# Altium PCB PCB_NUMPAD_AV-RK MK II_2023-07-25.pcbdoc
Units mil, origin at the board's own origin, x right, y up, seen from the top; angles counter-clockwise.
Board outline 8288.68 x 6421.25 mil, 2 copper layers (Top Layer, Bottom Layer); 72 components, 67 nets, 315 pads, 109 vias.
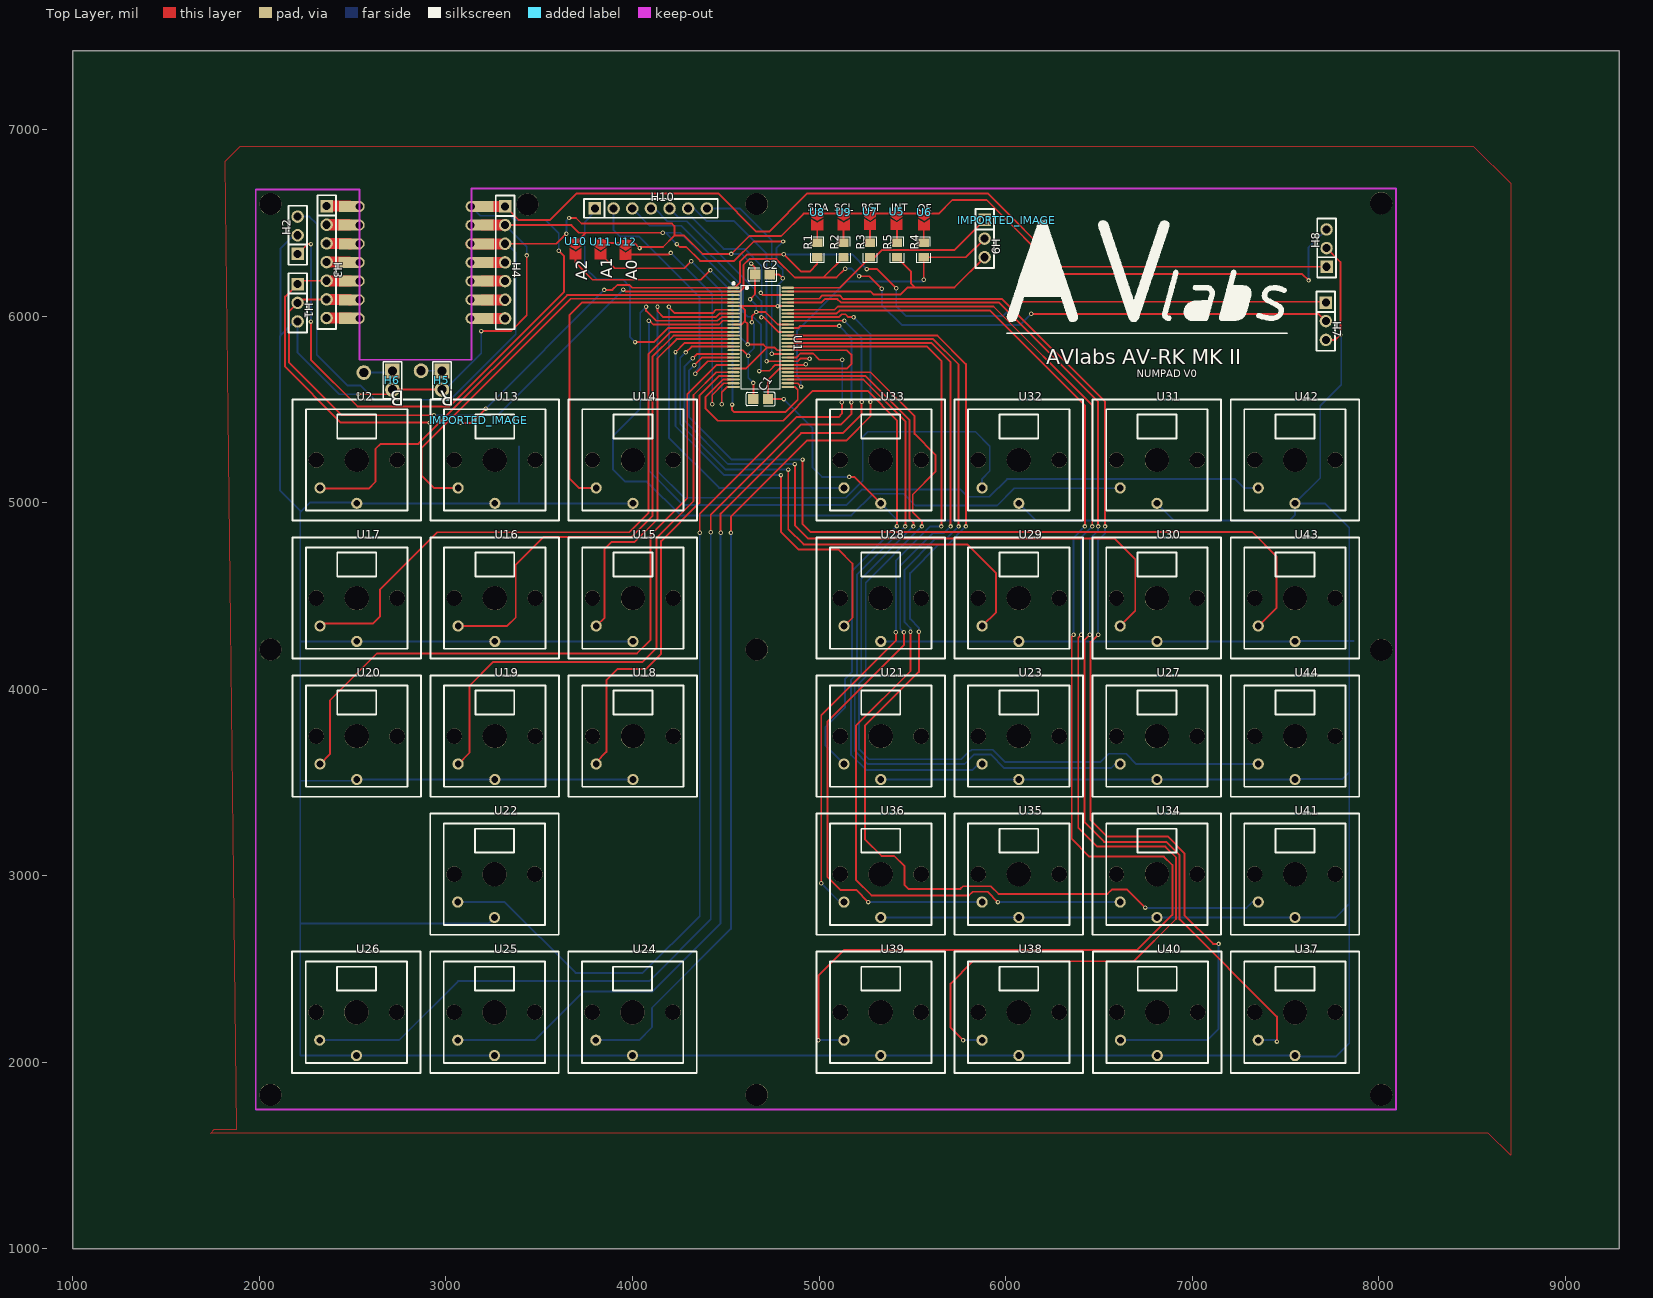
[diagram p0: Top Layer view]
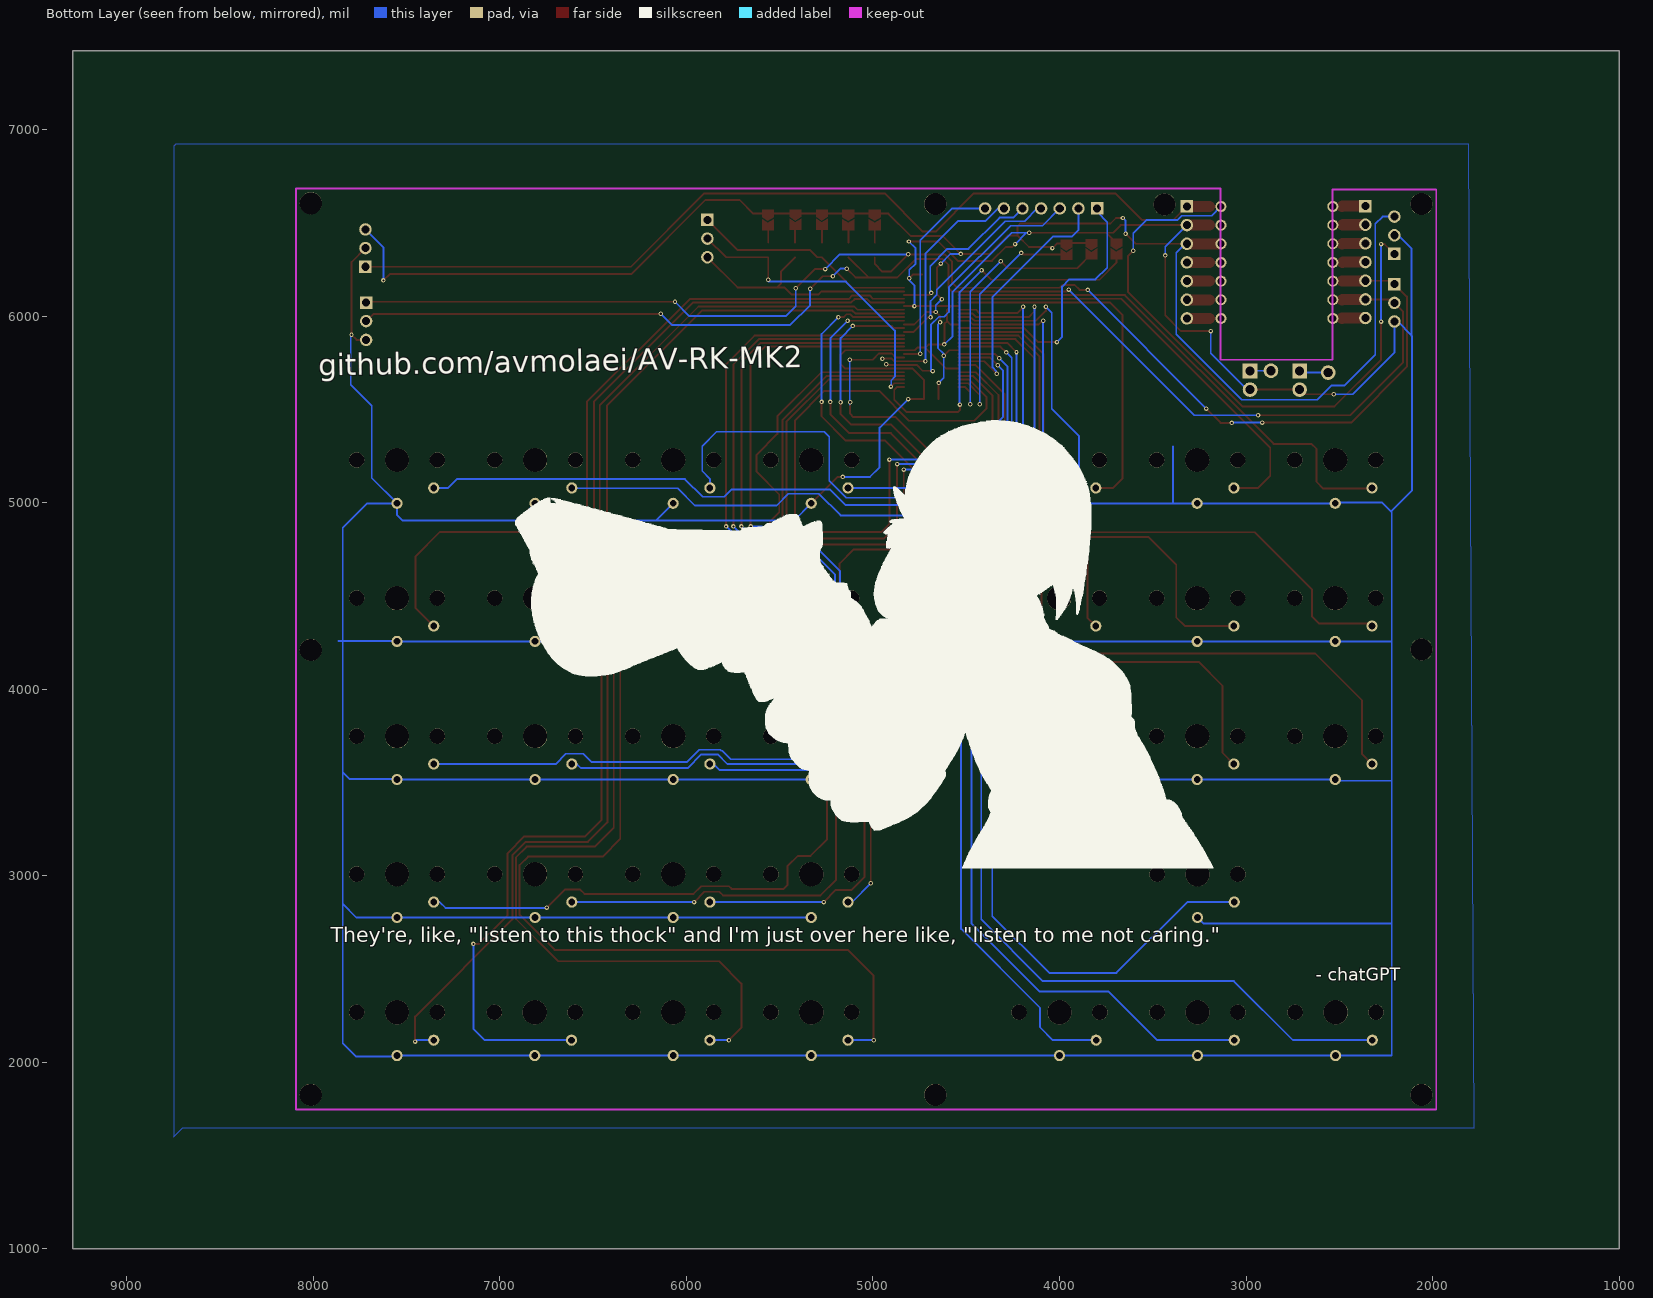
[diagram p1: Bottom Layer view, seen from below]

## Layer stack, top to bottom
Top Layer: signal copper (thickness not stored)
Dielectric: dielectric 12.6, FR-4, Dk 4.8
Bottom Layer: signal copper (thickness not stored)

## Board outline
9288.68,1000 1000,1000 1000,7421.25 9288.68,7421.25

## Components (designator, comment, footprint, x,y, rotation, side; value= is the part's Value field where it differs from the comment)
C1 "100nF" C0805 4687,5555.11 r0 top
C2 "100nF" C0805 4696.85,6222.43 r0 top
H1 "I2C_POGO_L" HDR-TH_3P-P2.54-V-M 2204.73,6070.86 r270 top
H2 "PWR_POGO_L" HDR-TH_3P-P2.54-V-M 2204.73,6433.06 r90 top
H3 "X6511WV-07H-C30D60" HDR-TH_7P-P2.54-V-M 2360.24,6289.36 r270 top
H4 "X6511WV-07H-C30D60" HDR-TH_7P-P2.54-V-M 3316.93,6287.39 r270 top
H5 "RST_MCU" HDR-TH_2P-P2.54-V-M 2978.35,5655.5 r270 top
H6 "BATT_MCU" HDR-TH_2P-P2.54-V-M 2712.6,5655.5 r270 top
H7 "I2C_POGO_R" HDR-TH_3P-P2.54-V-M 7716.53,5972.43 r270 top
H8 "PWR_POGO_R" HDR-TH_3P-P2.54-V-M 7720.46,6364.16 r90 top
H9 "PCA_PINS" HDR-TH_3P-P2.54-V-M 5887.79,6415.34 r270 top
H10 "X6511WV-07H-C30D60" HDR-TH_7P-P2.54-V-M 4098.42,6576.76 r0 top
IMPORTED_IMAGE "IMPORTED_IMAGE" IMPORTED_IMAGE 3174.53,5440.91 r0 top
IMPORTED_IMAGE "IMPORTED_IMAGE" IMPORTED_IMAGE 6007.15,6512.49 r0 top
R1 "4.7kΩ" R0805 4990.15,6354.32 r90 top
R2 "4.7kΩ" R0805 5131.89,6354.32 r90 top
R3 "1.1kΩ" R0805 5273.62,6354.32 r90 top
R4 "1.1kΩ" R0805 5561.02,6354.32 r90 top
R5 "2kΩ" R0805 5417.32,6354.32 r90 top
U1 "PCA9505DGG,118" TSSOP-56_L14.0-W6.1-P0.50-LS8.1-BL 4687,5885.82 r270 top
U2 "TECLA KAILH CHOC BAJO PERFIL 1350 RGB COPY" "TECLA  KAILH CHOC BAJO PERFIL 1350 RGB" 2521.65,5228.34 r0 top
U5 "beautiful-solderbridge" BEAUTIFUL-SOLDER-BRIDGE 5415.35,6559.05 r90 top
U6 "beautiful-solderbridge" BEAUTIFUL-SOLDER-BRIDGE 5562.99,6557.08 r90 top
U7 "beautiful-solderbridge" BEAUTIFUL-SOLDER-BRIDGE 5273.62,6559.05 r90 top
U8 "beautiful-solderbridge" BEAUTIFUL-SOLDER-BRIDGE 4990.15,6557.08 r90 top
U9 "beautiful-solderbridge" BEAUTIFUL-SOLDER-BRIDGE 5131.89,6557.08 r90 top
U10 "beautiful-solderbridge" BEAUTIFUL-SOLDER-BRIDGE 3694.88,6401.56 r90 top
U11 "beautiful-solderbridge" BEAUTIFUL-SOLDER-BRIDGE 3828.74,6399.6 r90 top
U12 "beautiful-solderbridge" BEAUTIFUL-SOLDER-BRIDGE 3962.6,6397.63 r90 top
U13 "TECLA KAILH CHOC BAJO PERFIL 1350 RGB COPY" "TECLA  KAILH CHOC BAJO PERFIL 1350 RGB" 3261.81,5228.34 r0 top
U14 "TECLA KAILH CHOC BAJO PERFIL 1350 RGB COPY" "TECLA  KAILH CHOC BAJO PERFIL 1350 RGB" 4001.97,5228.34 r0 top
U15 "TECLA KAILH CHOC BAJO PERFIL 1350 RGB COPY" "TECLA  KAILH CHOC BAJO PERFIL 1350 RGB" 4001.97,4488.18 r0 top
U16 "TECLA KAILH CHOC BAJO PERFIL 1350 RGB COPY" "TECLA  KAILH CHOC BAJO PERFIL 1350 RGB" 3261.81,4488.18 r0 top
U17 "TECLA KAILH CHOC BAJO PERFIL 1350 RGB COPY" "TECLA  KAILH CHOC BAJO PERFIL 1350 RGB" 2521.65,4488.18 r0 top
U18 "TECLA KAILH CHOC BAJO PERFIL 1350 RGB COPY" "TECLA  KAILH CHOC BAJO PERFIL 1350 RGB" 4001.97,3748.03 r0 top
U19 "TECLA KAILH CHOC BAJO PERFIL 1350 RGB COPY" "TECLA  KAILH CHOC BAJO PERFIL 1350 RGB" 3261.81,3748.03 r0 top
U20 "TECLA KAILH CHOC BAJO PERFIL 1350 RGB COPY" "TECLA  KAILH CHOC BAJO PERFIL 1350 RGB" 2521.65,3748.03 r0 top
U21 "TECLA KAILH CHOC BAJO PERFIL 1350 RGB COPY" "TECLA  KAILH CHOC BAJO PERFIL 1350 RGB" 5330.7,3748.03 r0 top
U22 "TECLA KAILH CHOC BAJO PERFIL 1350 RGB COPY" "TECLA  KAILH CHOC BAJO PERFIL 1350 RGB" 3259.84,3007.87 r0 top
U23 "TECLA KAILH CHOC BAJO PERFIL 1350 RGB COPY" "TECLA  KAILH CHOC BAJO PERFIL 1350 RGB" 6070.86,3748.03 r0 top
U24 "TECLA KAILH CHOC BAJO PERFIL 1350 RGB COPY" "TECLA  KAILH CHOC BAJO PERFIL 1350 RGB" 4000,2267.72 r0 top
U25 "TECLA KAILH CHOC BAJO PERFIL 1350 RGB COPY" "TECLA  KAILH CHOC BAJO PERFIL 1350 RGB" 3259.84,2267.72 r0 top
U26 "TECLA KAILH CHOC BAJO PERFIL 1350 RGB COPY" "TECLA  KAILH CHOC BAJO PERFIL 1350 RGB" 2519.69,2267.72 r0 top
U27 "TECLA KAILH CHOC BAJO PERFIL 1350 RGB COPY" "TECLA  KAILH CHOC BAJO PERFIL 1350 RGB" 6811.02,3748.03 r0 top
U28 "TECLA KAILH CHOC BAJO PERFIL 1350 RGB COPY" "TECLA  KAILH CHOC BAJO PERFIL 1350 RGB" 5330.7,4488.18 r0 top
U29 "TECLA KAILH CHOC BAJO PERFIL 1350 RGB COPY" "TECLA  KAILH CHOC BAJO PERFIL 1350 RGB" 6070.86,4488.18 r0 top
U30 "TECLA KAILH CHOC BAJO PERFIL 1350 RGB COPY" "TECLA  KAILH CHOC BAJO PERFIL 1350 RGB" 6811.02,4488.18 r0 top
U31 "TECLA KAILH CHOC BAJO PERFIL 1350 RGB COPY" "TECLA  KAILH CHOC BAJO PERFIL 1350 RGB" 6811.02,5228.34 r0 top
U32 "TECLA KAILH CHOC BAJO PERFIL 1350 RGB COPY" "TECLA  KAILH CHOC BAJO PERFIL 1350 RGB" 6070.86,5228.34 r0 top
U33 "TECLA KAILH CHOC BAJO PERFIL 1350 RGB COPY" "TECLA  KAILH CHOC BAJO PERFIL 1350 RGB" 5330.7,5228.34 r0 top
U34 "TECLA KAILH CHOC BAJO PERFIL 1350 RGB COPY" "TECLA  KAILH CHOC BAJO PERFIL 1350 RGB" 6811.02,3007.87 r0 top
U35 "TECLA KAILH CHOC BAJO PERFIL 1350 RGB COPY" "TECLA  KAILH CHOC BAJO PERFIL 1350 RGB" 6070.86,3007.87 r0 top
U36 "TECLA KAILH CHOC BAJO PERFIL 1350 RGB COPY" "TECLA  KAILH CHOC BAJO PERFIL 1350 RGB" 5330.7,3007.87 r0 top
U37 "TECLA KAILH CHOC BAJO PERFIL 1350 RGB COPY" "TECLA  KAILH CHOC BAJO PERFIL 1350 RGB" 7551.17,2267.72 r0 top
U38 "TECLA KAILH CHOC BAJO PERFIL 1350 RGB COPY" "TECLA  KAILH CHOC BAJO PERFIL 1350 RGB" 6070.86,2267.72 r0 top
U39 "TECLA KAILH CHOC BAJO PERFIL 1350 RGB COPY" "TECLA  KAILH CHOC BAJO PERFIL 1350 RGB" 5330.7,2267.72 r0 top
U40 "TECLA KAILH CHOC BAJO PERFIL 1350 RGB COPY" "TECLA  KAILH CHOC BAJO PERFIL 1350 RGB" 6812.98,2267.72 r0 top
U41 "TECLA KAILH CHOC BAJO PERFIL 1350 RGB COPY" "TECLA  KAILH CHOC BAJO PERFIL 1350 RGB" 7551.17,3007.87 r0 top
U42 "TECLA KAILH CHOC BAJO PERFIL 1350 RGB COPY" "TECLA  KAILH CHOC BAJO PERFIL 1350 RGB" 7551.17,5228.34 r0 top
U43 "TECLA KAILH CHOC BAJO PERFIL 1350 RGB COPY" "TECLA  KAILH CHOC BAJO PERFIL 1350 RGB" 7551.17,4488.18 r0 top
U44 "TECLA KAILH CHOC BAJO PERFIL 1350 RGB COPY" "TECLA  KAILH CHOC BAJO PERFIL 1350 RGB" 7551.17,3748.03 r0 top
? "" ? 3631.91,5678.24 r0 top
? "" ? 2078.09,4858.27 r0 top
? "" ? 3631.91,4839.06 r0 top
? "" ? 4391.46,4858.27 r0 top
? "" ? 4463.06,4118.1 r0 top
? "" ? 4403.09,4118.13 r0 top
? "" ? 2894.07,3377.95 r0 top
? "" ? 2889.76,2676.35 r0 top
? "" ? 6440.91,5576.04 r0 top
? "" ? 5037.4,6684.42 r0 top
? "" ? 8432.71,4220.47 r0 top

## Footprints (in the part's own frame and the unit in brackets; to place one, negate y for a bottom-side part, rotate by r counter-clockwise, add the part's x,y. Pads: shape width x height; smd on the part's side, far side on the other; paste and mask are expansions set on the pad)
BEAUTIFUL-SOLDER-BRIDGE [mil]
  Top Layer region: -96.46,31.5 -37.4,31.5 -57.09,0 -37.4,-31.5 -96.46,-31.5
  Top Layer region: -47.24,0 -27.56,31.5 11.81,31.5 11.81,-31.5 -27.56,-31.5
C0805 [mm]
  rect 1.41x1.35 smd paste-100 mask+0.051: 1(-1,0) 2(1,0)
  silkscreen extent -1.96,-0.9 1.96,0.9
HDR-TH_2P-P2.54-V-M [mm]
  rect 2x2 hole 1.2 paste+0 mask+0.051: 1(-1.27,0)
  round 2 hole 1.2 paste+0 mask+0.051: 2(1.27,0)
  silkscreen extent -2.54,-1.27 2.54,1.27
HDR-TH_3P-P2.54-V-M [mm]
  rect 1.7x1.7 hole 1.1 paste+0 mask+0.051: 1(-2.54,0)
  round 1.7 hole 1.1 paste+0 mask+0.051: 2(0,0) 3(2.54,0)
  silkscreen extent -4.02,-1.27 4.02,1.27
HDR-TH_7P-P2.54-V-M [mm]
  rect 1.7x1.7 hole 1.1 paste+0 mask+0.051: 1(-7.62,0)
  round 1.7 hole 1.1 paste+0 mask+0.051: 2(-5.08,0) 3(-2.54,0) 4(0,0) 5(2.54,0) 6(5.08,0) 7(7.62,0)
  silkscreen extent -9.1,-1.27 9.1,1.27
IMPORTED_IMAGE [mil]
R0805 [mil]
  rect 44.59x54.21 smd paste-3937.01 mask+2: 1(-39.37,0) 2(39.37,0)
  silkscreen extent -69,-36 69,36
"TECLA  KAILH CHOC BAJO PERFIL 1350 RGB" [mil]
  round 60 hole 36 paste+0 mask+2: 1(-196.85,-149.65) 2(0,-232.32)
  round 82.68 hole 82.68 unplated paste+0: ""(-216.53,-0.04) ""(216.54,-0.04)
  round 129.92 hole 129.92 unplated paste+0: ""(0,0)
  silkscreen extent -344,-325 344,325
TSSOP-56_L14.0-W6.1-P0.50-LS8.1-BL [mm]
  oval 0.28x1.7 smd paste+0 mask+0.051: 1(-6.75,-3.7) 2(-6.25,-3.7) 3(-5.75,-3.7) 4(-5.25,-3.7) 5(-4.75,-3.7) 6(-4.25,-3.7) 7(-3.75,-3.7) 8(-3.25,-3.7) 9(-2.75,-3.7) 10(-2.25,-3.7) 11(-1.75,-3.7) 12(-1.25,-3.7) 13(-0.75,-3.7) 14(-0.25,-3.7) 15(0.25,-3.7) 16(0.75,-3.7) 17(1.25,-3.7) 18(1.75,-3.7) 19(2.25,-3.7) 20(2.75,-3.7) 21(3.25,-3.7) 22(3.75,-3.7) 23(4.25,-3.7) 24(4.75,-3.7) 25(5.25,-3.7) 26(5.75,-3.7) 27(6.25,-3.7) 28(6.75,-3.7) 29(6.75,3.7) 30(6.25,3.7) 31(5.75,3.7) 32(5.25,3.7) 33(4.75,3.7) 34(4.25,3.7) 35(3.75,3.7) 36(3.25,3.7) 37(2.75,3.7) 38(2.25,3.7) 39(1.75,3.7) 40(1.25,3.7) 41(0.75,3.7) 42(0.25,3.7) 43(-0.25,3.7) 44(-0.75,3.7) 45(-1.25,3.7) 46(-1.75,3.7) 47(-2.25,3.7) 48(-2.75,3.7) 49(-3.25,3.7) 50(-3.75,3.7) 51(-4.25,3.7) 52(-4.75,3.7) 53(-5.25,3.7) 54(-5.75,3.7) 55(-6.25,3.7) 56(-6.75,3.7)
  silkscreen extent -7.49,-3.85 7.08,2.62
? [mil]

## Free pads (board coordinates)
  rect 118.11x59.05 smd paste+0 mask+2.01: 1(2484.41,6587.15) 2(2482.4,6487.82) 3(2484.41,6387.15) 4(2482.4,6287.82) 5(2484.41,6187.15) 6(2484.41,6087.15) 7(2484.37,5988.14) 8(3194.41,5987.15) 9(3194.41,6087.15) 10(3194.41,6187.15) 11(3194.41,6287.15) 14(3194.41,6587.15) 14(3194.85,6488.2) 14(3198.12,6387.3)
  round 59.05 hole 39.37 paste+0 mask+2.01: 1(2534.65,6587.39) 2(2534.65,6487.39) 3(2534.65,6387.39) 4(2534.65,6287.39) 5(2534.65,6187.39) 6(2534.41,6087.15) 7(2534.41,5987.15) 8(3134.41,5987.15) 9(3134.41,6087.15) 10(3134.41,6187.15) 11(3134.41,6287.15) 12(3134.41,6387.15) 13(3134.41,6487.15) 14(3134.65,6587.39)
  round 78.74 hole 47.24 slot 47.44 at 0 deg paste+0 mask+2: 3(2559.6,5696.84) 4(2866.27,5706.68)
  round 118.11 hole 118.11 unplated paste+0: ""(2059.06,1824.8) ""(2059.06,4212.59) ""(2059.06,6600.38) ""(3437.01,6598.41) ""(4665.35,1824.8) ""(4665.35,4212.59) ""(4665.35,6600.38) ""(8013.77,1824.8) ""(8013.77,4210.62) ""(8013.77,6604.32)

## Via types
v1: diameter 24.02, hole 12.01, Top Layer to Bottom Layer, tented both sides, 109 vias

## Nets (pads, with @x,y where several pads share a name; then routed paths per layer and width w, separated by ;. In a path a pad name is that pad's centre, name@x,y a point inside that pad or via, vN(x,y) a via of type N, cw(c..) or ccw(c..) an arc to the next point about the centre after c; other vN are vias at no path point)
5V_MCU: H2.1 H4.1 H8.1 pad.14@3134.65,6587.39 pad.14@3194.41,6587.15 | length 8290.3
  Top Layer w10: H2.1 2257.48,6385.81 v1(2275.6,6385.81) ; v1(2275.6,5970.46) 2275.61,5765.69 2525.61,5515.69 3019.71,5515.69 3631.91,6127.99 3631.91,6322.79 v1(3604.33,6350.38) ; pad.14@3134.61,6587.39 pad.14@3194.41,6587.19 ; H4.1 3388.61,6515.69 3559.01,6515.69 3700.81,6657.49 4458.71,6657.49 4663.41,6452.79 4732.31,6452.79 4937.01,6657.49 5903.61,6657.49 6296.91,6264.19 H8.1
  Top Layer w59.05: pad.14@3194.4,6587.15 3194.64,6587.39 H4.1
  Bottom Layer w10: v1(2275.6,5970.46) v1(2275.6,6385.81) ; pad.14@3134.61,6587.39 3184.61,6537.39 3344.51,6537.39 3368.11,6514.09 3535.11,6514.09 3604.33,6444.87 v1(3604.33,6350.38)
A0: U1.27 | length 1338
  Top Layer w10: 3962.6,6330.7 4196.85,6330.7 v1(4204.73,6338.57) ; v1(4427.21,5527.59) 4427.21,5576.79 4490.11,5639.79 U1.27
  Bottom Layer w10: v1(4204.73,6338.57) 4427.21,6116.09 v1(4427.21,5527.59)
A1: U1.28 | length 1509.1
  Top Layer w10: 3828.74,6332.67 3905.51,6255.9 4277.56,6255.9 v1(4314.96,6293.29) ; v1(4478.35,5527.55) 4478.31,5590.59 4507.91,5620.09 U1.28
  Bottom Layer w10: v1@4311.02,6293.3 v1(4314.96,6293.29) 4478.34,6129.91 v1(4478.35,5527.55)
A2: U1.29 | length 2130.1
  Top Layer w10: 3694.88,6334.64 3694.88,6285.42 3785.43,6194.87 4366.14,6194.87 v1(4417.32,6246.05) ; v1(4533.46,5525.58) 4533.51,5496.09 4543.31,5486.19 4820.81,5486.19 4885.81,5551.19 4885.81,5604.29 4870.11,5620.09 U1.29
  Bottom Layer w10: v1@4417.32,6249.99 v1(4417.32,6246.05) 4535.43,6127.94 4535.43,5527.55 v1(4533.46,5525.58)
INT_PCA: H9.3 R5.1 U1.55 | length 1375.7
  Top Layer w10: U1.55 5275.61,6131.89 5291.37,6116.13 5437,6116.13 5474.36,6153.49 5543.84,6153.49 ; R5.1@5417.31,6314.99 5492.11,6240.19 5492.11,6175.19 5513.81,6153.49 5726.01,6153.49 H9.3@5887.81,6315.39
IO_0_0: U1.3 U2.1 | length 2750.4
  Top Layer w10: U2.1 2328.7,5074.8 2584.65,5074.8 2622.05,5112.2 2622.05,5287.39 2649.65,5314.99 2852.41,5314.99 3649.61,6112.19 U1.3
IO_0_1: U1.4 U13.1 | length 2373.7
  Top Layer w10: U13.1 2935.11,5078.69 2870.11,5143.69 2870.11,5293.29 3669.31,6092.49 U1.4
IO_0_2: U1.5 U14.1 | length 1947.3
  Top Layer w10: U14.1 3712.61,5078.69 3661.41,5129.89 3661.41,6003.89 3730.31,6072.79 U1.5
IO_0_3: U1.7 U33.1 | length 2120.5
  Top Layer w10: v1(4194.88,6049.2) 4194.88,6047.23 4226.38,6015.74 4429.13,6015.74 4446.85,6033.46 U1.7
  Bottom Layer w10: v1(4194.88,6049.2) 4194.91,5347.89 4464.11,5078.69 U33.1@5133.81,5078.69
IO_0_4: U1.8 U32.1 | length 3730.6
  Top Layer w10: v1(4133.86,6049.2) 4133.86,6025.58 4165.35,5994.09 4446.85,5994.09 4466.53,6013.77 U1.8
  Bottom Layer w10: v1(4133.86,6049.2) 4133.91,5169.19 4277.51,5025.59 5141.81,5025.59 5234.21,5118.09 5234.21,5352.39 5261.71,5379.89 5838.61,5379.89 5915.31,5303.09 5915.31,5169.29 5874.01,5127.99 U32.1
IO_0_5: U1.9 U31.1 | length 4398.3
  Top Layer w10: v1(4072.84,6049.2) 4072.83,6027.55 4125.98,5974.4 4451.2,5974.4 4454.72,5974.4 4478.35,5994.09 U1.9
  Bottom Layer w10: v1(4072.84,6049.2) 4041.31,6017.68 4041.31,5503.89 3895.71,5358.29 3895.71,5177.19 3960.61,5112.19 4076.81,5112.19 4257.91,4931.09 5173.21,4931.09 5289.41,5047.19 5452.71,5047.19 5515.71,4984.29 5954.71,4984.29 6047.21,5076.79 6612.21,5076.79 U31.1
IO_0_6: U1.10 U42.1 | length 4728.7
  Top Layer w10: v1(4086.62,5974.4) 4092.51,5974.39 4112.21,5954.69 4464.61,5954.69 4484.21,5974.39 U1.10
  Bottom Layer w10: v1(4086.62,5974.4) 4088.58,5972.44 4088.58,5169.31 4271.61,4986.19 5145.71,4986.19 5230.38,5070.86 5757.87,5070.86 5797.24,5031.49 5913.38,5031.49 6007.87,5125.98 7230.31,5125.98 7277.59,5078.69 U42.1
IO_0_7: H10.1 U1.12 | length 1491.2
  Top Layer w10: v1(4013.78,5860.22) 4114.17,5860.23 4188.97,5935.03 U1.12
  Bottom Layer w10: H10.1 3798.42,6558.26 3744.09,6503.93 3744.09,6259.83 3807.09,6196.84 3946.85,6196.84 3985.43,6158.26 3985.43,5888.58 v1(4013.78,5860.22)
IO_1_0: U1.13 U17.1 | length 3454.4
  Top Layer w10: U17.1 2338.61,4352.39 2610.21,4352.39 2645.71,4387.79 2645.71,4533.49 2952.71,4840.59 3982.31,4840.59 4084.61,4942.89 4084.61,5795.29 4204.71,5915.39 U1.13@4541.31,5915.39
IO_1_1: U1.14 U16.1 | length 2787.8
  Top Layer w10: U16.1 3328.71,4338.59 3374.01,4383.89 3374.01,4667.29 3521.61,4814.99 3994.11,4814.99 4106.31,4927.19 4106.31,5781.49 4220.51,5895.69 U1.14
IO_1_2: U1.15 U15.1 | length 2093.8
  Top Layer w10: U15.1 3850.39,4383.81 3850.39,4751.96 3887.79,4789.36 4011.81,4789.36 4133.86,4911.41 4133.86,5773.61 4236.22,5875.98 U1.15
IO_1_3: U1.16 U28.1 | length 2513.9
  Top Layer w10: v1(4230.32,5807.08) 4279.52,5856.29 U1.16 ; v1(4795.28,5147.63) 4795.28,4844.42 4891.71,4747.99 5104.31,4747.99 5179.11,4673.19 5179.11,4383.79 U28.1@5133.81,4338.49
  Bottom Layer w10: v1(4230.32,5807.08) 4230.31,5409.44 4492.12,5147.63 v1(4795.28,5147.63)
IO_1_4: U1.17 U29.1 | length 3190.3
  Top Layer w10: v1(4285.43,5805.11) 4316.93,5836.61 U1.17 ; v1(4834.65,5177.16) 4834.64,4858.26 4917.31,4775.59 5795.31,4775.59 5948.81,4622.09 5948.81,4413.29 U29.1
  Bottom Layer w10: v1(4285.43,5805.11) 4255.91,5775.59 4255.91,5421.29 4500.04,5177.16 v1(4834.65,5177.16)
IO_1_5: U1.19 U30.1 | length 3888
  Top Layer w10: v1(4322.84,5773.61) 4346.46,5797.24 U1.19 ; v1(4870.08,5206.68) 4870.08,4877.95 4940.93,4807.09 6584.61,4807.09 6694.91,4696.89 6694.91,4419.29 U30.1
  Bottom Layer w10: v1(4322.84,5773.61) 4279.53,5730.31 4279.53,5438.97 4511.81,5206.68 v1(4870.08,5206.68)
IO_1_6: U1.20 U43.1 | length 4595.9
  Top Layer w10: v1@4328.74,5734.24 v1(4330.71,5736.19) 4372.01,5777.59 U1.20 ; v1(4911.42,5230.31) 4911.41,4883.85 4952.75,4842.51 7320.86,4842.51 7452.75,4710.62 7452.75,4435.03 7356.25,4338.53 U43.1
  Bottom Layer w10: v1(4330.71,5736.19) 4303.15,5708.63 4303.15,5458.65 4531.49,5230.31 v1(4911.42,5230.31)
IO_1_7: H10.2 U1.21 | length 1377.8
  Top Layer w10: v1(4336.61,5690.93) 4403.54,5757.87 U1.21
  Bottom Layer w10: H10.2 3898.41,6459.79 3931.11,6427.19 4033.51,6427.19 4358.31,6102.39 4358.31,5724.39 4338.61,5704.69 4338.61,5692.89 v1(4336.61,5690.93)
IO_2_0: U1.22 U20.1 | length 3927.3
  Top Layer w10: U20.1 2377.91,3651.49 2377.91,3938.99 2629.91,4190.89 4023.61,4190.89 4096.41,4263.79 4096.41,4826.79 4293.31,5023.59 4293.31,5573.55 ; 4293.31,5573.59 4293.31,5580.69 4450.81,5738.19 U1.22
IO_2_1: U1.24 U19.1 | length 3235.4
  Top Layer w10: U19.1 3126.01,3659.39 3126.01,4017.69 3253.91,4145.69 4055.11,4145.69 4127.91,4218.49 4127.91,4809.09 4326.81,5007.89 4326.81,5576.79 4448.81,5698.79 U1.24
IO_2_2: U1.25 U18.1 | length 2519.3
  Top Layer w10: U18.1 3805.11,3608.29 3860.21,3663.39 3860.21,4047.19 3921.31,4108.29 4072.81,4108.29 4153.51,4188.99 4153.51,4793.29 4358.31,4997.99 4358.31,5572.79 4464.61,5679.09 U1.25
IO_2_3: U1.26 U21.1 | length 3477.1
  Top Layer w10: U1.26 4484.21,5659.39 4391.71,5566.89 4391.71,5503.89 4456.71,5438.99 4807.11,5438.99 4966.51,5598.39 5259.81,5598.39 5417.31,5440.99 v1(5417.31,4873.99)
  Bottom Layer w10: U21.1@5133.81,3598.39 5033.51,3698.79 5033.51,3795.29 5139.81,3901.59 5139.81,4055.09 5177.21,4092.49 5177.16,4633.85 ; 5177.21,4634.59 v1(5417.31,4873.99)
IO_2_4: U1.31 U23.1 | length 3380.2
  Top Layer w10: U1.31 5238.21,5659.39 5462.61,5434.99 v1(5462.61,4871.99)
  Bottom Layer w10: v1(5462.61,4871.99) 5202.71,4612.09 5202.71,4080.69 5171.21,4049.19 5171.21,3647.59 5252.01,3566.89 5822.81,3566.89 5854.31,3598.39 U23.1
IO_2_5: U1.32 U27.1 | length 4175.4
  Top Layer w10: U1.32 5248.02,5679.13 5484.25,5442.9 5484.25,4915.35 5505.9,4893.7 v1(5505.9,4872.04)
  Bottom Layer w10: v1(5505.9,4872.04) 5226.41,4592.49 5226.41,4072.89 5190.91,4037.39 5190.91,3669.29 5261.81,3598.39 5779.51,3598.39 5830.71,3649.59 5919.31,3649.59 5992.11,3576.79 6564.91,3576.79 6586.61,3598.39 U27.1
IO_2_6: U1.33 U44.1 | length 5069.8
  Top Layer w10: U1.33 5275.61,5698.79 5511.81,5462.59 5511.81,5368.09 5624.01,5255.89 5624.01,5165.39 5502.01,5043.29 5502.01,4948.79 5551.21,4899.59 v1(5551.21,4871.99)
  Bottom Layer w10: v1(5551.21,4871.99) 5250.01,4570.79 5250.01,4066.89 5214.61,4031.49 5214.61,3677.19 5267.71,3623.99 5761.81,3623.99 5807.11,3669.29 5813.01,3669.29 5818.91,3675.19 5931.11,3675.19 5996.01,3610.19 6509.81,3610.19 6553.11,3653.49 6645.71,3653.49 6700.81,3598.39 U44.1
IO_2_7: H10.3 U1.35 | length 1549.8
  Top Layer w10: v1(4679.13,5704.71) 4681.1,5706.68 4734.25,5706.68 4765.74,5738.18 U1.35 4925.19,5738.18 v1(4929.13,5742.12)
  Bottom Layer w10: H10.3 4090.91,6484.29 4261.81,6484.29 4592.51,6153.49 4592.51,6021.65 4618.11,5996.05 4645.75,5996.05 4689.01,5952.79 4689.01,5704.69 v1(4679.13,5704.71)
IO_3_0: H10.6 U1.36 | length 1332.7
  Top Layer w10: v1(4718.5,5757.86) U1.36 4885.83,5757.87 4899.6,5771.65 v1(4948.82,5771.64)
  Bottom Layer w10: H10.6 4328.74,6576.76 4395.67,6509.83 4542.52,6509.83 4718.5,6333.85 v1(4718.5,5757.86)
IO_3_1: U1.37 U22.1 | length 5339.2
  Top Layer w10: v1(4360.21,4838.59) 4360.21,4940.91 4877.95,5458.65 5104.33,5458.65 5122.05,5476.38 v1(5122.05,5537.39) ; U1.37@4832.67,5777.55 4877.95,5777.55 4899.6,5799.2 4968.5,5799.2 5001.97,5765.74 v1(5124.01,5765.74)
  Bottom Layer w10: U22.1 3315.01,2858.19 3694.91,2478.39 4055.11,2478.39 4360.21,2783.49 v1(4360.21,4838.59) ; 5124.01,5524.6 v1@5124.01,5766.72
IO_3_2: H10.7 U1.38 | length 1113.9
  Top Layer w10: v1(4746.06,5797.23) U1.38
  Bottom Layer w10: H10.7 4575.59,6576.76 4746.06,6406.29 v1(4746.06,5797.23)
IO_3_3: U1.40 U36.1 | length 4142.3
  Top Layer w10: U1.40 5578.71,5836.59 5655.51,5759.79 v1(5655.51,4871.99) ; v1(5011.81,2958.66) 5011.81,3860.23 5411.42,4259.84 v1(5411.42,4305.11) ; U36.1@5112.25,2858.22 U36.1
  Bottom Layer w10: v1(5011.81,2958.66) 5112.25,2858.22 U36.1 ; v1(5411.42,4305.11) 5411.41,4687 5596.4,4871.99 v1(5655.51,4871.99)
IO_3_4: U1.41 U35.1 | length 4883.3
  Top Layer w10: U1.41 5600.41,5856.29 5704.71,5751.99 v1(5704.72,4872.04) ; v1(5263.81,2858.19) 5198.81,2923.19 5114.21,2923.19 5045.31,2992.09 5045.31,3826.79 5454.71,4236.19 v1(5454.72,4305.11)
  Bottom Layer w10: v1(5263.81,2858.19) U35.1 ; v1(5454.72,4305.11) 5435.03,4324.8 5435.03,4661.41 5610.23,4836.61 5669.29,4836.61 v1(5704.72,4872.04)
IO_3_5: U1.42 U34.1 | length 5502.9
  Top Layer w10: U1.42 5612.21,5875.99 5748.03,5740.17 v1(5748.03,4872.04) ; v1(5490.16,4307.08) 5490.16,4096.46 5198.81,3805.11 5198.81,2976.38 5281.49,2893.7 5803.15,2893.7 5822.83,2913.38 5903.54,2913.38 v1(5958.7,2858.22)
  Bottom Layer w10: v1@5490.11,4307.09 5490.11,4326.79 5458.71,4358.19 5458.71,4639.79 5624.01,4805.09 5681.11,4805.09 v1(5748.03,4872.04) ; v1(5958.7,2858.22) U34.1
IO_3_6: U1.43 U41.1 | length 6221.3
  Top Layer w10: U1.43 5633.91,5895.69 5787.4,5742.2 v1(5787.4,4872.04) ; v1(5535.43,4307.08) 5535.43,4092.51 5246.06,3803.14 5246.06,3194.88 5334.64,3106.3 5401.57,3106.3 5458.66,3049.21 5458.66,2948.82 5478.34,2929.13 5757.87,2929.13 5771.65,2942.91 5921.25,2942.91 5962.59,2901.57 6545.27,2901.57 6568.89,2925.19 6651.57,2925.19 v1(6748.03,2828.73)
  Bottom Layer w10: v1(5535.43,4307.08) 5535.43,4328.73 5488.18,4375.98 5488.18,4622.04 5639.76,4773.61 5688.97,4773.61 v1(5787.4,4872.04) ; v1(6748.03,2828.73) 6749.99,2826.77 7291.33,2826.77 7322.78,2858.22 U41.1
IO_3_7: H10.4 U1.44 | length 1075.1
  Top Layer w10: v1(4690.94,5994.08) 4702.71,5994.09 4781.51,5915.39 U1.44@4832.71,5915.39
  Bottom Layer w10: H10.4 4118.11,6576.79 4187.01,6507.89 4291.31,6507.89 4657.51,6141.69 4657.51,6114.09 4690.91,6080.69 v1(4690.94,5994.08)
IO_4_0: U1.45 U26.1 | length 6291.2
  Top Layer w10: v1(4419.31,4840.59) 4419.31,4935.09 4903.51,5419.29 5118.11,5419.29 5173.21,5474.39 v1(5173.21,5537.39) ; U1.45 4887.79,5935.03 4899.6,5946.84 v1(5108.27,5946.84)
  Bottom Layer w10: U26.1 2748.01,2118.09 3065.01,2434.99 4088.61,2434.99 4419.31,2765.79 v1(4419.31,4840.59) ; v1(5108.27,5946.84) 5173.21,5881.9 v1(5173.21,5537.39)
IO_4_1: U1.47 U25.1 | length 5683.9
  Top Layer w10: v1(4472.44,4838.57) 4472.44,4940.94 4903.54,5372.04 5125.98,5372.04 5228.34,5474.4 v1(5228.35,5539.36) ; U1.47 v1(5135.83,5974.4)
  Bottom Layer w10: U25.1 3476.31,2118.09 3736.21,2377.99 4106.31,2377.99 4472.44,2744.12 v1(4472.44,4838.57) ; v1(5135.83,5974.4) 5228.34,5881.88 v1(5228.35,5539.36)
IO_4_2: U1.48 U24.1 | length 5148.4
  Top Layer w10: v1@4527.51,4838.59 4527.51,4925.19 4935.01,5332.69 5145.71,5332.69 5275.61,5462.59 v1(5275.61,5539.39) ; U1.48 5106.29,5994.09 5122.04,6009.83 5141.73,6009.83 5157.48,5994.09 v1(5185.04,5994.08)
  Bottom Layer w10: U24.1 4035.42,2118.09 4104.33,2187 4104.33,2291.33 4527.56,2714.57 v1(4527.56,4838.57) ; v1(5185.04,5994.08) 5275.61,5903.51 v1(5275.61,5539.39)
IO_4_3: U1.49 U39.1 | length 7543.7
  Top Layer w10: U1.49 5094.51,6013.79 5110.21,6029.49 5917.31,6029.49 6425.21,5521.69 v1(6425.19,4872.04) ; v1(4996.11,2118.09) 4996.11,2462.59 5135.81,2602.39 6706.71,2602.39 6893.71,2789.39 6893.71,3057.09 6848.41,3102.39 6448.81,3102.39 6354.31,3196.89 6354.31,4281.49 v1(6364.17,4291.33)
  Bottom Layer w10: v1(4996.11,2118.09) U39.1@5133.81,2118.09 ; v1(6364.17,4291.33) 6364.17,4811.02 v1(6425.19,4872.04)
IO_4_4: U1.50 U38.1 | length 6860.5
  Top Layer w10: U1.50 5082.71,6033.49 5100.41,6051.19 5935.11,6051.19 6464.61,5521.69 v1(6464.56,4872.04) ; v1(5771.71,2118.09) 5704.71,2184.99 5704.71,2421.29 5824.81,2541.29 6687.01,2541.29 6913.41,2767.69 6913.41,3098.39 6856.31,3155.49 6490.11,3155.49 6389.71,3255.89 6389.71,4275.59 v1(6405.51,4291.33)
  Bottom Layer w10: v1(5771.71,2118.09) U38.1 ; v1(6405.51,4291.33) 6405.51,4812.98 v1(6464.56,4872.04)
IO_4_5: U1.52 U37.1 | length 6085.2
  Top Layer w10: U1.52 5013.78,6072.83 5031.49,6090.54 5098.42,6090.54 5116.17,6072.79 5962.61,6072.79 6496.01,5539.39 v1@6496.01,4871.99 ; v1(6450.81,4291.29) 6423.22,4263.71 6423.22,3285.43 6527.55,3181.1 6862.2,3181.1 6933.06,3110.23 6933.06,2765.74 7454.72,2244.09 v1(7454.72,2110.23)
  Bottom Layer w10: v1(6450.81,4291.29) 6450.81,4805.09 6496.01,4850.39 v1@6496.01,4871.99 ; U37.1 7446.89,2118.07 v1(7454.72,2110.23)
  other v1: 6496.06,4872.04
IO_4_6: U1.53 U40.1 | length 6387.4
  Top Layer w10: U1.53 4999.99,6092.51 5017.71,6110.23 5110.23,6110.23 5129.92,6090.54 5978.46,6090.54 5980.41,6092.49 6533.51,5539.39 v1(6533.46,4872.04) ; v1(6496.01,4291.29) 6458.61,4253.89 6452.71,4253.89 6454.71,4251.99 6454.71,3299.19 6543.31,3210.59 6868.11,3210.59 6958.61,3120.09 6958.61,2787.39 7112.21,2633.89 v1(7141.71,2633.89)
  Bottom Layer w10: v1(6496.01,4291.29) 6496.01,4799.19 6533.51,4836.59 v1(6533.46,4872.04) ; U40.1 7080.71,2118.09 7141.71,2179.09 v1(7141.71,2633.89)
IO_4_7: H10.5 U1.54 | length 916.4
  Top Layer w10: v1(4687.01,6124) 4698.81,6112.2 U1.54
  Bottom Layer w10: H10.5 4247.64,6527.55 4320.86,6527.55 4488.19,6360.23 4600.39,6360.23 4692.91,6267.71 v1@4692.91,6124.4
OE_PCA: H9.2 R4.1 U1.30 | length 1670.9
  Top Layer w10: U1.30 4885.82,5639.76 v1(4903.54,5622.04) ; v1(5561.01,6194.89) R4.1@5561.01,6314.99 ; R4.1@5561.02,6314.95 5787.4,6314.95 H9.2
  Bottom Layer w10: v1@4901.51,5618.99 4901.51,5654.49 4881.81,5674.19 4881.81,5922.09 5144.71,6184.99 5559.01,6184.99 v1@5559.01,6191.89
R1_2: R1.2 | length 96.5
  Top Layer w10: R1.2 4990.15,6490.15
R2_2: R2.2 | length 96.5
  Top Layer w10: R2.2 5131.89,6490.15
R3_2: R3.2 | length 98.4
  Top Layer w10: R3.2 5273.62,6492.11
R4_2: R4.2 | length 97.3
  Top Layer w10: R4.2 5561.02,6488.18 5562.99,6490.15
R5_2: R5.2 | length 99.2
  Top Layer w10: 5415.35,6492.11 5417.32,6490.15 R5.2
RESET_PCA: H9.1 R3.1 U1.56 | length 1205.8
  Top Layer w10: U1.56 5110.23,6151.57 5273.62,6314.95 5299.21,6314.95 5338.58,6354.32 5726.77,6354.32 H9.1
S$9891: 
S$41694: 
SCL_PCA: H1.2 H3.6 H7.2 pad.6 R2.1 U1.2 | length 7160.2
  Top Layer w10: H1.2 2157.51,6023.59 2157.51,5751.99 2440.91,5468.49 v1(2935.04,5468.49) ; H1.2 2223.24,6089.36 H3.6 ; v1(3950.79,6141.72) 3960.63,6131.88 U1.2 ; U1.2 4576.81,6131.89 4594.51,6149.59 4594.51,6273.59 4626.01,6305.09 4771.61,6305.09 4870.11,6206.69 5023.61,6206.69 ; R2.1@5131.91,6314.99 5023.61,6206.69 ; v1(5139.76,6253.92) 5092.52,6206.69 5023.61,6206.69 ; v1(5214.57,6213.56) 5268.71,6213.56 v1(5336.61,6145.66) ; v1(6137.79,6011.8) 7677.15,6011.8 H7.2
  Top Layer w59.05: H3.6 2482.2,6089.36 pad.6@2484.4,6087.15
  Bottom Layer w10: v1(2935.04,5468.49) 3277.56,5468.49 v1(3950.79,6141.72) ; v1(5139.76,6253.92) 5174.2,6253.93 v1(5214.57,6213.56) ; v1(5336.61,6145.66) 5336.61,6059.05 5442.91,5952.75 6078.73,5952.75 v1(6137.79,6011.8)
SDA_PCA: H1.1 H3.5 H7.1 pad.5 R1.1 U1.1 | length 7415.1
  Top Layer w10: H1.1 2137.81,6103.89 2137.81,5728.29 2437.01,5429.09 v1(2913.39,5429.12) ; H1.1 2223.24,6189.36 H3.5 ; v1(3076.77,5427.15) 3135.77,5427.16 v1(3212.6,5503.98) ; v1(3848.41,6139.79) 3891.71,6139.79 3919.31,6167.29 3982.31,6167.29 3998.01,6151.59 U1.1 4547.21,6151.59 4576.81,6181.09 4576.81,6293.29 4614.21,6330.69 v1(4811.02,6330.7) 4903.51,6238.19 4948.81,6238.19 4990.11,6279.49 R1.1@4990.11,6314.99 ; v1(5255.9,6251.96) 5311.02,6251.96 v1(5413.38,6149.59) ; v1(6061.02,6076.76) 7712.19,6076.76 H7.1
  Top Layer w59.05: H3.5 2360.24,6187.43 2360.36,6187.31 pad.5@2484.41,6187.19
  Bottom Layer w10: v1(2913.39,5429.12) 3074.8,5429.13 v1(3076.77,5427.15) ; v1@3212.6,5501.96 v1(3212.6,5503.98) v1(3848.41,6139.79) ; v1(4811.02,6330.7) 5177.16,6330.7 v1(5255.9,6251.96) ; v1(5413.38,6149.59) 5413.38,6053.14 5466.53,5999.99 5984.25,5999.99 v1(6061.02,6076.76)
U3_1: H3.1 pad.1 | length 125.1
  Top Layer w59.05: H3.1 2482.2,6589.36 pad.1@2484.4,6587.15
U3_2: H3.2 pad.2 | length 122.8
  Top Layer w59.05: H3.2 2480.86,6489.36 pad.2@2482.4,6487.82
U3_3: H3.3 pad.3@2484.41,6387.15 pad.3@2534.65,6387.39 | length 125.1
  Top Layer w59.05: H3.3 2482.2,6389.36 pad.3@2484.4,6387.15
U3_4: H3.4 pad.4@2482.4,6287.82 pad.4@2534.65,6287.39 | length 122.8
  Top Layer w59.05: H3.4 2480.86,6289.36 pad.4@2482.4,6287.82
U3_7: H3.7 pad.7 | length 124.6
  Top Layer w59.05: H3.7 2483.14,5989.36 pad.7@2484.37,5988.14
U3_8: H4.7 pad.8 | length 122.6
  Top Layer w59.05: pad.8@3194.4,5987.15 3316.69,5987.15 H4.7
U3_9: H4.6 pad.9 | length 122.6
  Top Layer w59.05: pad.9@3194.4,6087.15 3316.69,6087.15 H4.6
U3_10: H4.5 pad.10 | length 122.6
  Top Layer w59.05: pad.10@3194.4,6187.15 3316.69,6187.15 H4.5
U3_11: H4.4 pad.11 | length 122.6
  Top Layer w59.05: pad.11@3194.4,6287.15 3316.69,6287.15 H4.4
VDD_PCA: C1.1 C2.1 H2.3 H4.3 H8.3 pad.12 pad.14@3198.12,6387.3 U1.18 U1.46 | length 9606.1
  Top Layer w10: H4.3 3591.91,6387.19 v1(3645.67,6440.93) ; v1(3659.45,6525.58) 3696.85,6525.58 3726.38,6496.05 4210.63,6496.05 4224.41,6482.27 4224.41,6431.09 ; 3828.74,6391.72 3960.64,6391.72 3962.6,6389.76 ; 3962.61,6389.79 4011.81,6389.79 v1(4037.41,6364.19) 4043.28,6370.07 4163.38,6370.07 4224.41,6431.09 ; U1.18 4590.55,5816.92 v1(4620.08,5787.39) ; v1(4629.92,6090.54) 4657.48,6118.1 C2.1 4657.48,6259.83 v1(4635.83,6281.48) ; v1(4639.76,5966.52) 4639.76,5998.02 v1(4663.39,6021.64) 4711.95,6021.64 4778.87,5954.72 U1.46 ; C1.1 v1(4647.64,5641.72) ; v1(7624.01,6190.93) 7590.54,6224.4 6295.27,6224.4 5897.63,6622.04 5714.56,6622.04 5641.73,6549.2 5562.99,6549.2 4990.16,6549.2 4917.32,6549.2 4797.24,6429.12 4625.98,6429.12 v1(4529.53,6332.66) 4375.98,6332.67 4277.56,6431.09 4224.41,6431.09
  Top Layer w59.05: pad.12 3198.15,6387.26 H4.3
  Bottom Layer w10: H2.3 2267.71,6533.49 2307.11,6494.09 2307.11,5791.29 2470.51,5627.99 2541.31,5627.99 2618.11,5551.19 3021.61,5551.19 3374.01,5903.49 3374.01,6338.59 3325.21,6387.39 H4.3 ; v1(3645.67,6440.93) 3645.67,6511.8 v1(3659.45,6525.58) ; v1(4529.53,6332.66) 4584.64,6332.67 v1(4635.83,6281.48) ; v1(4629.92,6090.54) 4663.38,6057.08 v1(4663.39,6021.64) ; v1(4639.76,5966.52) 4651.57,5954.72 4651.57,5828.73 4620.08,5797.23 v1(4620.08,5787.39) 4620.08,5669.28 v1(4647.64,5641.72) ; v1(7624.01,6190.93) 7624.01,6367.7 H8.3
VSS_PCA: C1.2 C2.2 H1.3 H2.2 H4.2 H5.2 H6.2 H7.3 H8.2 pad.13 pad.14@3194.85,6488.2 U1.6 U1.11 U1.23 U1.34 U1.39 U1.51 U2.2 U13.2 U14.2 U15.2 U16.2 U17.2 U18.2 U19.2 U20.2 U21.2 U22.2 U23.2 U24.2 U25.2 U26.2 U27.2 U28.2 U29.2 U30.2 U31.2 U32.2 U33.2 U34.2 U35.2 U36.2 U37.2 U38.2 U39.2 U40.2 U41.2 U42.2 U43.2 U44.2 | length 40500.8
  Top Layer w10: v1(2529.53,5580.7) 2687.8,5580.7 H6.2 H5.2 ; v1(3188.98,5919.28) 3348.42,5919.28 3433.07,6003.93 v1(3433.07,6324.79) ; H4.2 3672.05,6487.39 3712.6,6446.84 3770.38,6446.84 ; 3694.88,6393.69 3748.03,6446.84 v1(4161.42,6446.84) ; v1(4238.19,6385.81) 4253.93,6370.07 4287.4,6370.07 4362.2,6295.27 4545.27,6295.27 4649.6,6399.6 v1(4807.09,6399.59) ; U1.23 4606.31,5718.49 4718.51,5830.69 ; U1.11 4584.61,5954.69 4602.41,5972.39 ; U1.6 4582.71,6053.09 4602.41,6033.49 4602.41,5972.39 ; U1.6 U1.51 ; C2.2 4785.43,6222.43 v1(4805.12,6202.74) ; v1(4811.02,5555.11) C1.2 4726.38,5657.47 4787.4,5718.49 U1.34 5149.61,5718.49 5173.21,5742.09 5173.21,5793.29 5149.61,5816.89 U1.39 4775.61,5816.89 4761.81,5830.69 4718.51,5830.69 ; v1(5161.42,5137.79) 5188.94,5137.79 U33.2 ; H7.3 7768.1,5872.43 v1(7795.27,5899.59) 7795.27,6289.36 H8.2 ; 4602.41,5972.39 4617.19,5957.61 v1(4617.19,5847.5) 4701.7,5847.5 4718.51,5830.69
  Top Layer w59.05: pad.14@3194.88,6488.18 3195.67,6487.39 H4.2
  Bottom Layer w10: 2112.21,5893.69 2112.21,6360.23 2185.04,6433.06 H2.2 ; 2218.51,2743.78 3228.07,2743.78 U22.2@3259.84,2775.55 ; 2218.51,3508.78 2514.73,3508.78 U20.2 U18.2 ; 2218.51,4255.59 U17.2@2521.61,4255.59 ; 2222.14,4952.51 2110.24,5064.41 2110.24,5893.69 2187.4,5970.85 H1.3 2204.73,5803.14 2427.16,5580.7 v1(2529.53,5580.7) ; U2.2@2521.61,4995.99 2517.71,4999.99 2269.71,4999.99 2218.51,4948.89 2218.51,2035.39 U26.2 U24.2 U39.2 U37.2 ; U17.2 U15.2 ; U2.2 U14.2 ; H5.2 2993.31,5605.49 3189.01,5801.19 v1(3188.98,5919.28) ; H4.2 3433.07,6371.25 v1(3433.07,6324.79) ; 3391.6,4996.02 3391.6,5301.17 ; v1(4238.19,6385.81) 4177.16,6446.84 v1(4161.42,6446.84) 4255.9,6446.84 4572.83,6129.91 4572.83,5891.86 v1(4617.19,5847.5) ; v1(4777.56,6053.14) 4777.56,6165.35 4805.11,6192.9 v1(4805.12,6202.74) 4805.11,6248.02 4771.65,6281.49 4771.65,6364.15 v1(4807.09,6399.59) ; v1(4811.02,5555.11) 4964.56,5401.57 4964.56,5188.97 5015.74,5137.79 v1(5161.42,5137.79) ; U36.2@5330.7,2775.55 U41.2@7551.17,2775.55 ; U21.2 U44.2 7553.18,3517.71 7805.11,3517.71 7842.51,3555.11 7842.51,3644.74 ; U28.2 U43.2 7554.18,4258.88 7864.21,4258.88 ; U33.2 5423.19,4903.54 7521.64,4903.54 7551.17,4933.06 U42.2 7687,5131.85 7687,5519.68 7799.2,5631.88 7799.2,5895.66 v1(7795.27,5899.59) ; U32.2 6163.34,4903.54 6174.63,4903.54 ; U31.2 6903.5,4903.54 6906.63,4903.54 ; U37.2 7555.11,2031.49 7771.61,2031.49 7842.51,2102.29 7842.51,4864.19 7710.71,4995.99 U42.2 ; U41.2@7551.21,2775.59 7769.71,2775.59 7842.51,2848.39 7842.51,2913.09
pads on no net: H5.1 H6.1 U2. U13. U14. U15. U16. U17. U18. U19. U20. U21. U22. U23. U24. U25. U26. U27. U28. U29. U30. U31. U32. U33. U34. U35. U36. U37. U38. U39. U40. U41. U42. U43. U44.
copper on no net: | length 295.4
  Bottom Layer w10: 2547.25,5696.84 2559.6,5696.84 2703.94,5696.84 2712.6,5705.5 ; 2852.36,5706.68 2866.27,5706.68 2977.17,5706.68 2978.35,5705.5

## Polygon pours and split planes (outlines as drawn)
VSS_PCA on Bottom Layer (solid): 1807.09,6921.25 8738.18,6921.25 8748.02,6911.41 8748.02,1600.39 8698.81,1649.61 1777.56,1649.61
VSS_PCA on Top Layer (solid): 1816.93,6830.7 1897.64,6911.41 8507.86,6911.41 8706.68,6712.59 8706.68,1500 8586.6,1620.08 1738.19,1620.08 1757.88,1639.76 1877.96,1639.76

## Silkscreen, mask and mechanical layers (free items; w line width, h text height)
Top Overlay:
  lines w10 net S$41694: 6007.87,5907.48 7507.86,5907.48
  text "SDA" at 4938.98,6562.66 h40
  text "SCL" at 5080.71,6562.66 h40
  text "RST" at 5226.38,6562.66 h40
  text "INT" at 5385.83,6560.7 h40
  text "OE" at 5529.53,6558.73 h40
  text "A1" at 3892.21,6202.74 h60 r90
  text "A0" at 4026.06,6192.9 h60 r90
  text "A2" at 3756.38,6190.93 h60 r90
  text "AVlabs AV-RK MK II" at 6218.5,5741.48 h80
  text "NUMPAD V0" at 6702.75,5672.9 h40
  text "B" at 2775.6,5599.04 h80 r180
  text "R" at 3043.31,5599.04 h80 r180
Bottom Overlay:
  text "github.com/avmolaei/AV-RK-MK2" at 7970.47,5641.72 h196.85 r359
  text "They're, like, \"listen to this thock\" and I'm just over here like, \"listen to me not caring.\"" at 7907.47,2616.14 h137.79
  text "- chatGPT" at 2625.99,2411.41 h118.11